# Allegro board power.brd
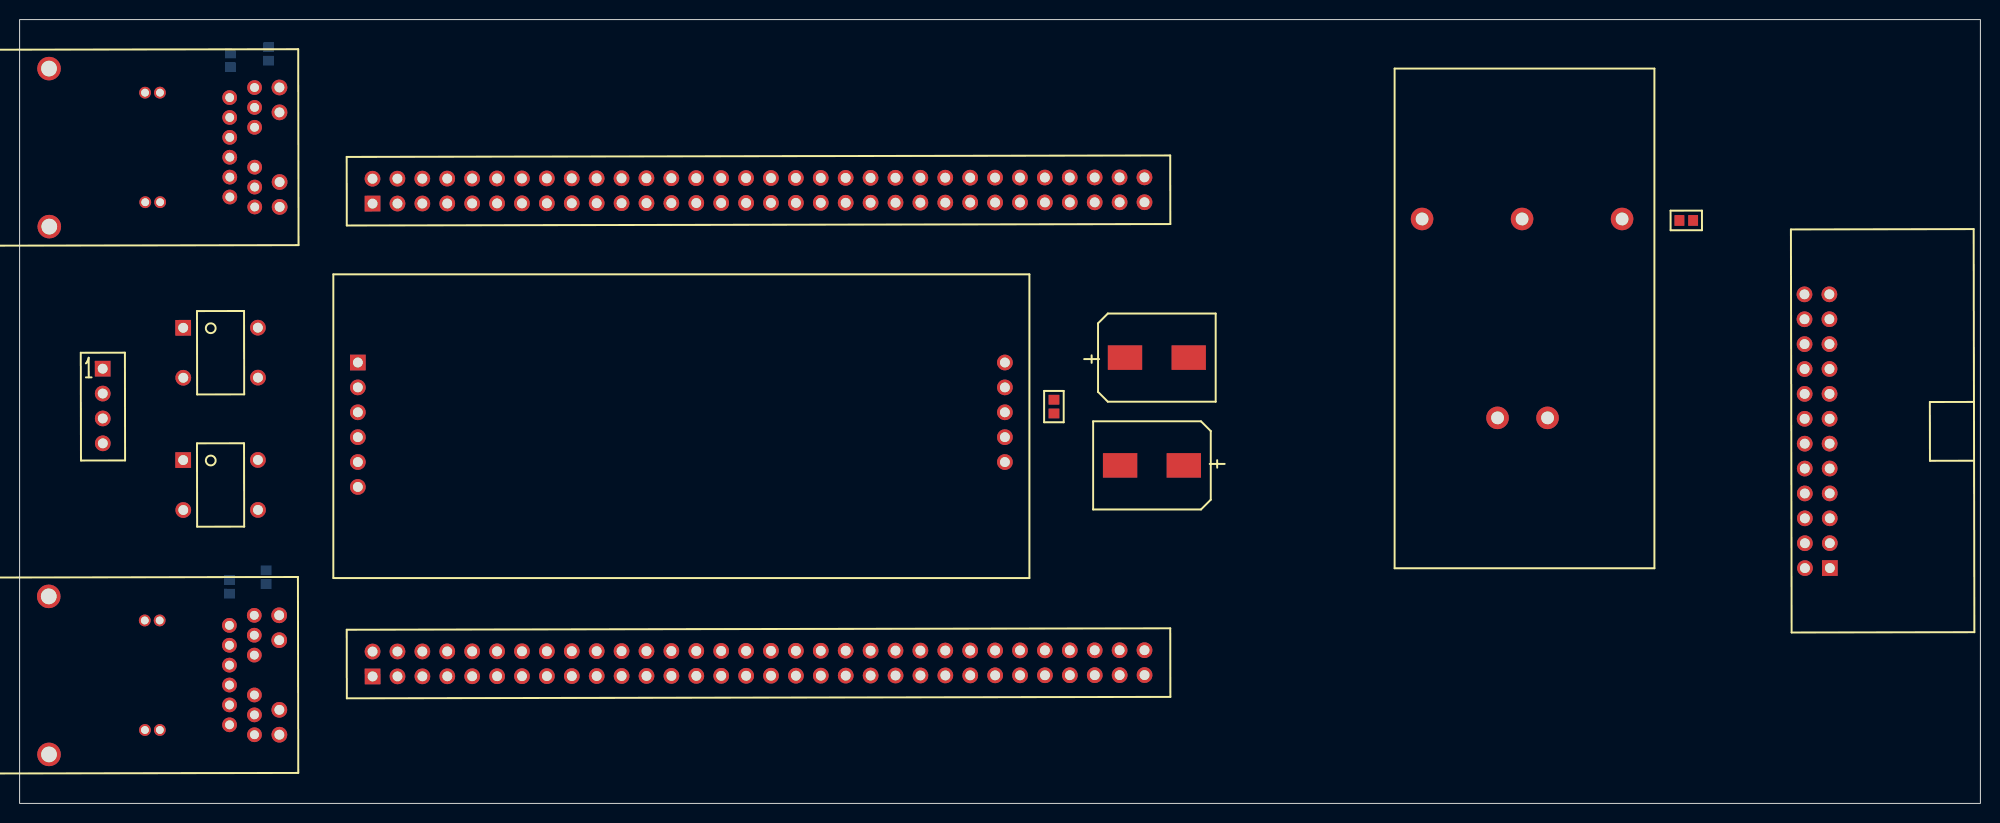
[diagram p0: board, top side]
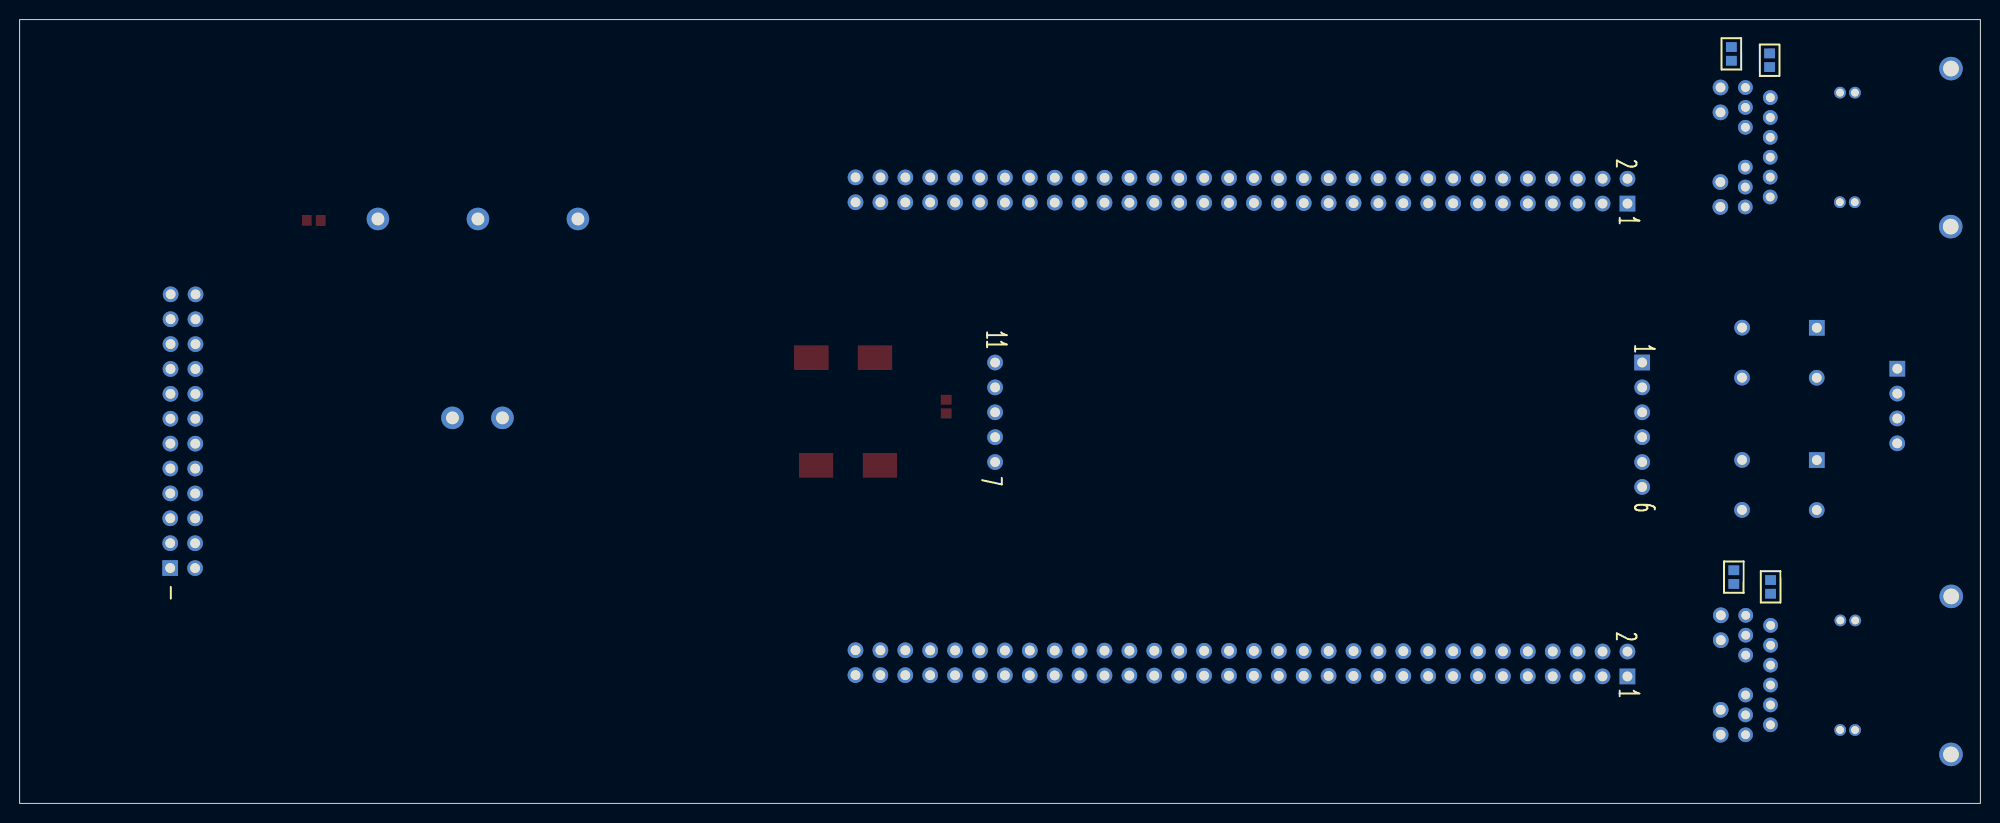
[diagram p1: board, bottom side, seen from below]

Outline 200 x 80 mm; copper layers: TOP, VSS, VDD, BOTTOM. Coordinates in mm from the lower left corner of the outline.
Outline path: rectangle 0,0 200,80

## Placement (name value [footprint] x y rotation side)
C1  2.2u  [C0603]  170 59.5 0.1 top
C2  470u  [ECAP8]  116 45.5 270 top
C3  0.1u  [C0603]  105.5 40.5 270 top
C4  470u  [ECAP8]  115.5 34.5 90 top
C5  0.1u  [C0603]  21.4 22.1 89.9 bottom
C6  0.1u  [C0603]  25.15 23.1 90.1 bottom
C7  0.1u  [C0603]  21.5 75.85 89.9 bottom
C8  0.1u  [C0603]  25.4 76.5 89.9 bottom
J1  -  [7499411121]  21.43 66.97 180.1 top
J2  -  [7499411121]  21.41 13.1 180.1 top
J3  4 HEADER  [PLUG-4]  9.81 5 0.1 top
J4  CONN SOCKET 32x2  [M20-6103245]  75.37 14.3 90.1 top
J5  CONN SOCKET 32x2  [M20-6103245]  75.37 62.56 90.1 top
J6  IDC-24MS  [IDC-24MR]  183.35 37.99 0.1 top
NOREF  -  []  0 0 90 top
NOREF#2  -  []  0 80 0 top
U1  SKE10B-05  [SKE10]  153.25 49.5 90 top
U2  DF01M  [DFM4]  20.5 46 0.1 top
U3  -  [AG5100]  34.5 45 0 top
U4  DF01M  [DFM4]  20.5 32.5 0.1 top

## Library data of the parts
C1 = CAP NP: room: 2
C2 C4 = CAP: room: 1
C3 = CAP NP: room: 1
C5-C8 = CAP NP
J1 J2 = 7499411121_1
J3 = 4 HEADER_1
J4 J5 = CONN SOCKET 32x2
J6 = CONN PCB 12x2_1
U1 = SKE10B-05: room: 2
U2 U4 = DF01M_0
U3 = AG5100_0: room: 1

## Footprints (pads in the part's own frame, mm; a bottom-side part is the same pattern mirrored in y, then rotated)
7499411121
  round 0 hole 3.2 unplated: (15.24,6.35) (15.24,-6.35)
  round 2.4 hole 1.6: (18.42,8.065) (18.42,-8.065)
  round 1.5 hole 0.9: 1(0,5.075) 2(0,3.045) 3(0,1.015) 4(0,-1.015) 5(0,-3.045) 6(0,-5.075) 7(-2.54,6.095) 8(-2.54,4.065) 9(-2.54,2.035) 10(-2.54,-2.035) 11(-2.54,-4.065) 12(-2.54,-6.095)
  round 1.2 hole 0.8: 13(7.11,5.59) 14(7.11,-5.59) 15(8.63,5.59) 16(8.63,-5.59)
  round 1.6 hole 1: 17(-5.08,6.095) 18(-5.08,3.555) 19(-5.08,-3.555) 20(-5.08,-6.095)
AG5100
  rect 1.6x1.6 hole 1: 1(0,0)
  round 1.6 hole 1: 2(0,-2.54) 3(0,-5.08) 4(0,-7.62) 5(0,-10.16) 6(0,-12.7) 7(66,-10.16) 8(66,-7.62) 9(66,-5.08) 10(66,-2.54) 11(66,0)
C0603
  rect 1x1.1 smd: 1(-0.7,0) 2(0.7,0)
DFM4
  rect 1.6x1.6 hole 1: 1(-3.81,2.55)
  round 1.6 hole 1: 2(-3.81,-2.55) 3(3.81,-2.55) 4(3.81,2.55)
ECAP8
  rect 2.5x3.5 smd: 1(0,-3.25) 2(0,3.25)
IDC-24MR
  rect 1.6x1.6 hole 1: 1(1.27,-13.97)
  round 1.6 hole 1: 2(-1.27,-13.97) 3(1.27,-11.43) 4(-1.27,-11.43) 5(1.27,-8.89) 6(-1.27,-8.89) 7(1.27,-6.35) 8(-1.27,-6.35) 9(1.27,-3.81) 10(-1.27,-3.81) 11(1.27,-1.27) 12(-1.27,-1.27) 13(1.27,1.27) 14(-1.27,1.27) 15(1.27,3.81) 16(-1.27,3.81) 17(1.27,6.35) 18(-1.27,6.35) 19(1.27,8.89) 20(-1.27,8.89) 21(1.27,11.43) 22(-1.27,11.43) 23(1.27,13.97) 24(-1.27,13.97)
M20-6103245
  rect 1.6x1.6 hole 1: 1(-1.27,39.37)
  round 1.6 hole 1: 2(1.27,39.37) 3(-1.27,36.83) 4(1.27,36.83) 5(-1.27,34.29) 6(1.27,34.29) 7(-1.27,31.75) 8(1.27,31.75) 9(-1.27,29.21) 10(1.27,29.21) 11(-1.27,26.67) 12(1.27,26.67) 13(-1.27,24.13) 14(1.27,24.13) 15(-1.27,21.59) 16(1.27,21.59) 17(-1.27,19.05) 18(1.27,19.05) 19(-1.27,16.51) 20(1.27,16.51) 21(-1.27,13.97) 22(1.27,13.97) 23(-1.27,11.43) 24(1.27,11.43) 25(-1.27,8.89) 26(1.27,8.89) 27(-1.27,6.35) 28(1.27,6.35) 29(-1.27,3.81) 30(1.27,3.81) 31(-1.27,1.27) 32(1.27,1.27) 33(-1.27,-1.27) 34(1.27,-1.27) 35(-1.27,-3.81) 36(1.27,-3.81) 37(-1.27,-6.35) 38(1.27,-6.35) 39(-1.27,-8.89) 40(1.27,-8.89) 41(-1.27,-11.43) 42(1.27,-11.43) 43(-1.27,-13.97) 44(1.27,-13.97) 45(-1.27,-16.51) 46(1.27,-16.51) 47(-1.27,-19.05) 48(1.27,-19.05) 49(-1.27,-21.59) 50(1.27,-21.59) 51(-1.27,-24.13) 52(1.27,-24.13) 53(-1.27,-26.67) 54(1.27,-26.67) 55(-1.27,-29.21) 56(1.27,-29.21) 57(-1.27,-31.75) 58(1.27,-31.75) 59(-1.27,-34.29) 60(1.27,-34.29) 61(-1.27,-36.83) 62(1.27,-36.83) 63(-1.27,-39.37) 64(1.27,-39.37)
PLUG-4
  rect 1.6x1.6 hole 1: 1(-1.27,39.37)
  round 1.6 hole 1: 2(-1.27,36.83) 3(-1.27,34.29) 4(-1.27,31.75)
SKE10
  round 2.3 hole 1.3: 1(-10.15,-2.6) 2(-10.15,2.5) 3(10.15,-10.2) 4(10.15,0) 5(10.15,10.2)

## Nets
3.3V: C6.1 J2.12(CT1T) J2.18(PH2_A) J2.20(PH1_A) J4.51
3.3V_M: C7.1 C8.1 J1.6(CT1R) J1.12(CT1T) J1.18(PH2_A) J1.20(PH1_A) J5.53
5V: C1.1 J4.5 J4.6 J5.61 J5.63 J6.13(19) J6.14(7) U1.3(+VOUT)
12V: C2.1 C3.1 J4.57 J6.10(5) U1.1(+VI N) U3.11(VOUT2)
48V: J6.1(13) U2.3(DC OUT PLUS) U3.3(VIN1+) U3.4(VIN2+) U4.3(DC OUT PLUS)
-12V: C3.2 C4.2 J4.64 J6.6(3) U3.8(0V1)
0: C1.2 C2.2 C4.1 C5.2 C6.2 C7.2 C8.2 J4.1 J4.2 J4.34 J4.43 J4.44 J4.45 J4.46 J4.52 J4.53 J4.54 J4.59 J4.60 J4.61 J4.62 J5.1 J5.2 J5.47 J5.48 J5.50 J5.51 J5.56 J5.58 J5.59 J5.64 J6.5(15) J6.7(16) J6.8(4) J6.9(17) J6.11(18) J6.12(6) J6.15(20) U1.2(-VI N) U1.5(-VOUT) U2.4(DC OUT MINUS) U3.1(VIN1-) U3.6(VIN2-) U3.9(VOUT1) U3.10(0V2) U4.4(DC OUT MINUS)
ADC_IN: J4.63 J6.2(1)
D1OUT: J4.28 J6.3(14)
EN_AMP: J5.26 J6.16(8)
EN_PWM: J5.8 J6.20(10)
GPIO1: J5.13 J6.22(11)
GPIO2: J5.15 J6.21(23)
GPIO3: J5.14 J6.19(22)
GPIO4: J5.16 J6.18(9)
PH1_C_L: J2.19(PH1_C) J4.49
PH1_C_R: J1.19(PH1_C) J5.55
PH2_C_L: J2.17(PH2_C) J4.47
PH2_C_R: J1.17(PH2_C) J5.57
PWM_NO: J5.9 J6.23(24)
PWM_O: J5.7 J6.24(12)
PWR_1-2: J1.13(P12) J2.13(P12) U4.1(AC IN 1)
PWR_3-6: J1.14(P36) J2.14(P36) U4.2(AC IN 2)
PWR_4-5: J1.15(P45) J2.15(P45) U2.1(AC IN 1)
PWR_7-8: J1.16(P78) J2.16(P78) U2.2(AC IN 2)
RX+_L: J2.4(RX+) J3.1 J4.56
RX+_R: J1.4(RX+) J5.60
RX-_L: J2.5(RX-) J3.2 J4.58
RX-_R: J1.5(RX-) J5.62
SH_HYD: J5.18 J6.17(21)
TX+_L: J2.11(TX+) J3.4 J4.48
TX+_R: J1.11(TX+) J5.52
TX-_L: J2.10(TX-) J3.3 J4.50
TX-_R: J1.10(TX-) J5.54
N2149984: C5.1 J2.6(CT1R)

Pads without a net: J1 1 2 3 7 8 9; J2 1 2 3 7 8 9; J4 3 4 7 8 9 10 11 12 13 14 15 16 17 18 19 20 21 22 23 24 25 26 27 29 30 31 32 33 35 36 37 38 39 40 41 42 55; J5 3 4 5 6 10 11 12 17 19 20 21 22 23 24 25 27 28 29 30 31 32 33 34 35 36 37 38 39 40 41 42 43 44 45 46 49; J6 4; U1 4; U3 2 5 7

## Copper pours and planes (outline as drawn; the poured copper is in the pictures)
5V on VDD: 0.5,0.5 199.5,0.5 199.5,79.5 0.5,79.5
12V on VDD: 96.7,41.2 120.8,41.2 120.8,33 186.8,33 186.8,35.4 158.5,35.4 158.5,41.4 153.8,41.4 153.8,35.4 125.3,35.4 125.3,46.9 94.3,46.9 94.3,18 103.3,18 103.3,10.8 108.3,10.9 108.3,21.8 96.7,21.8
48V on VDD: 16,0.5 16,24.8 20.2,29 20.2,46.8 39.39,46.8 39.5,29.5 31.6,24.2 18.6,24.2 18.6,4 183.45,4 183.45,25.25 187.8,25.25 187.8,0.5
-12V on VDD: 97,22.1 108.5,22.1 108.5,10.9 120.2,10.9 120.2,27.9 186.8,27.9 186.8,32.8 120.6,32.8 120.6,41 97,41
0 on VSS: 0.5,0.5 199.5,0.5 199.5,79.5 0.5,79.5
